# Altium PCB icmu150_n32_dp.PcbDoc
Units mm, origin at the board's own origin, x right, y up, seen from the top; angles counter-clockwise.
Board outline 46 x 33.03 mm, 4 copper layers (Top Layer, L1, L2, Bottom Layer), stack 1.522 mm thick; 23 components, 9 nets, 92 pads, 40 vias.
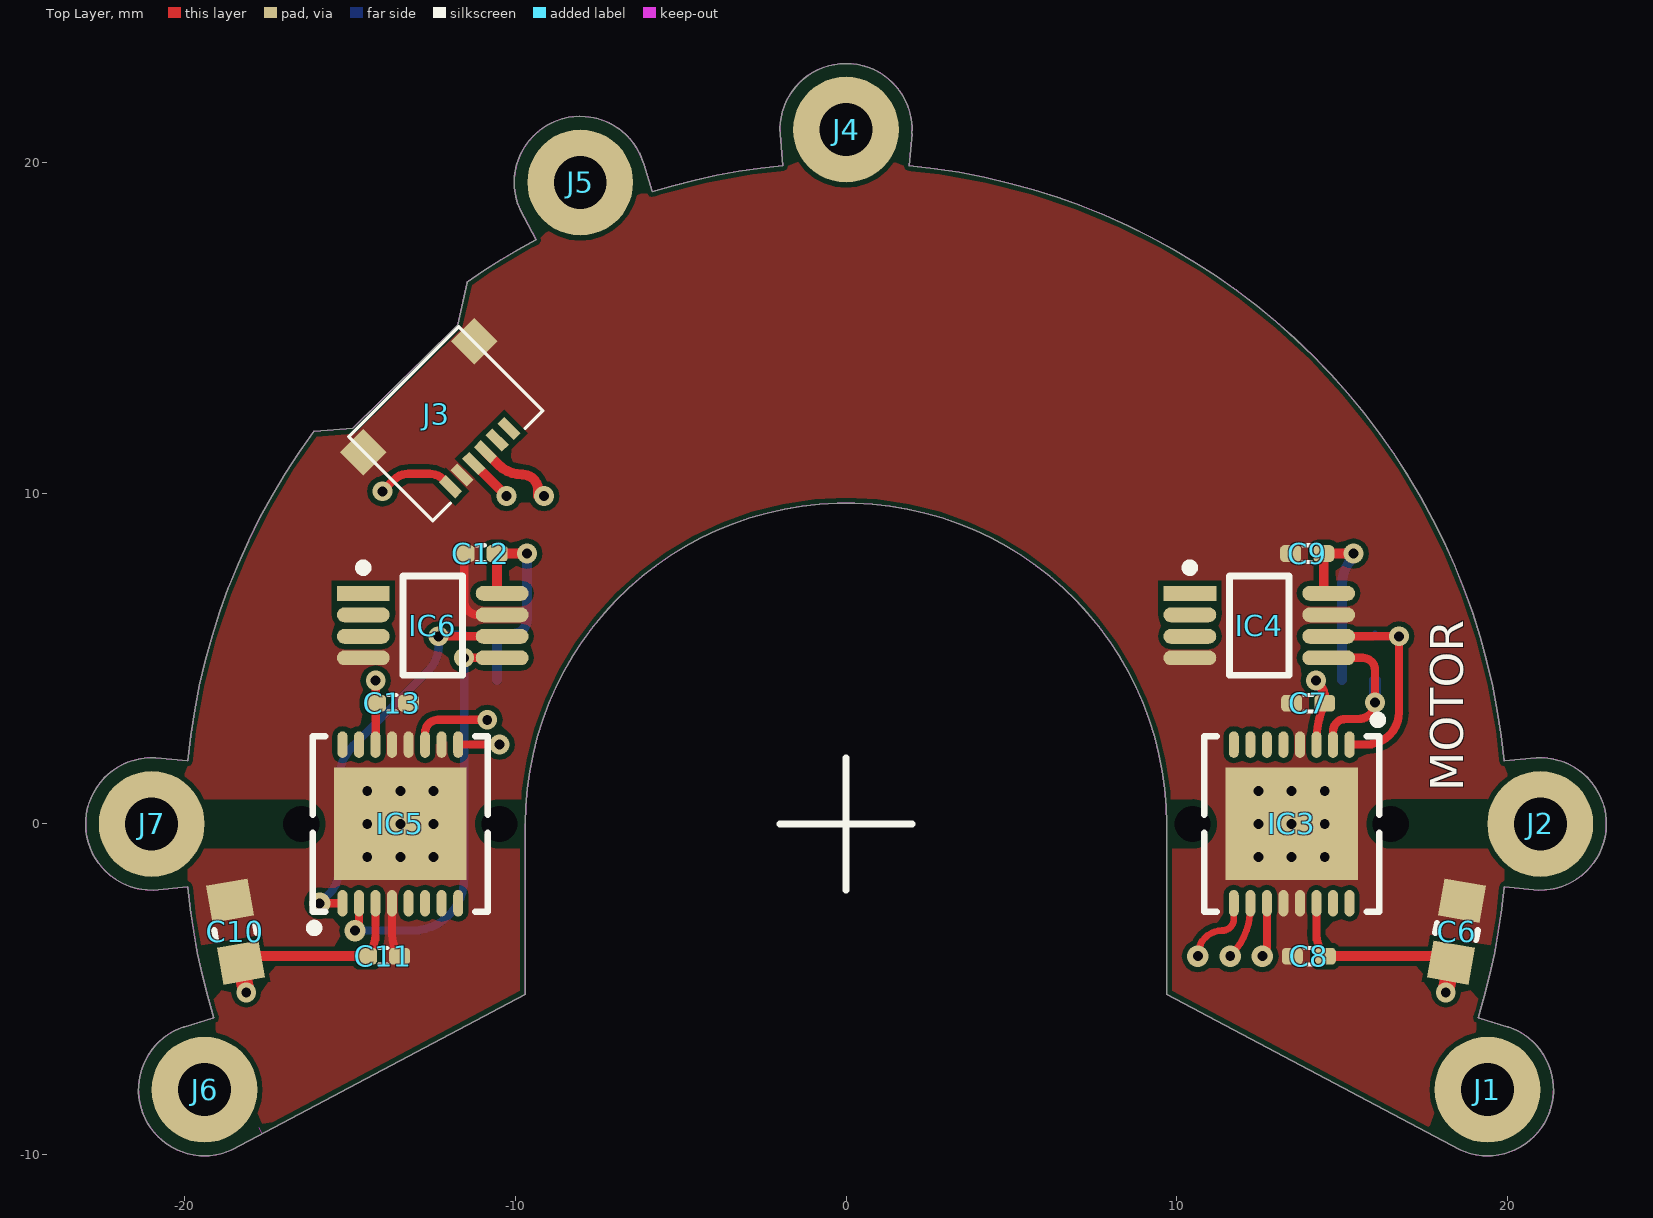
[diagram p0: Top Layer view]
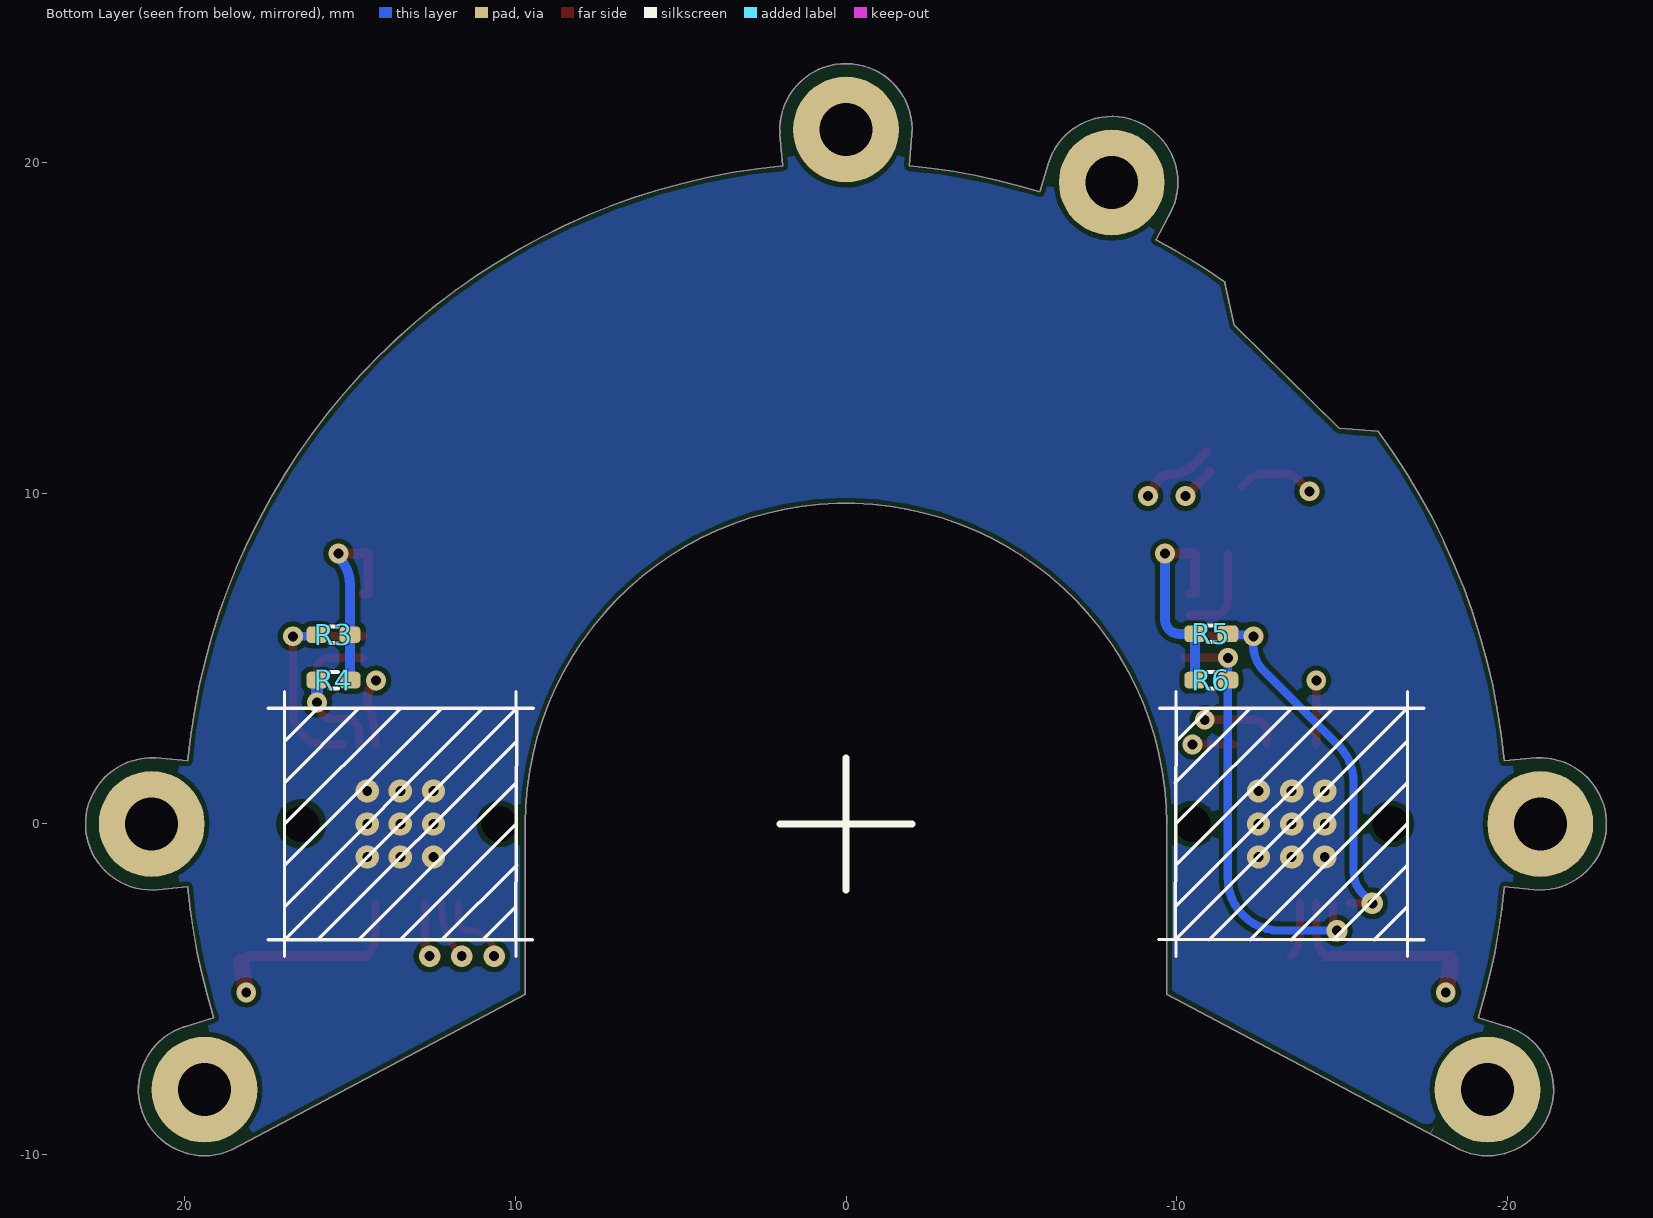
[diagram p1: Bottom Layer view, seen from below]
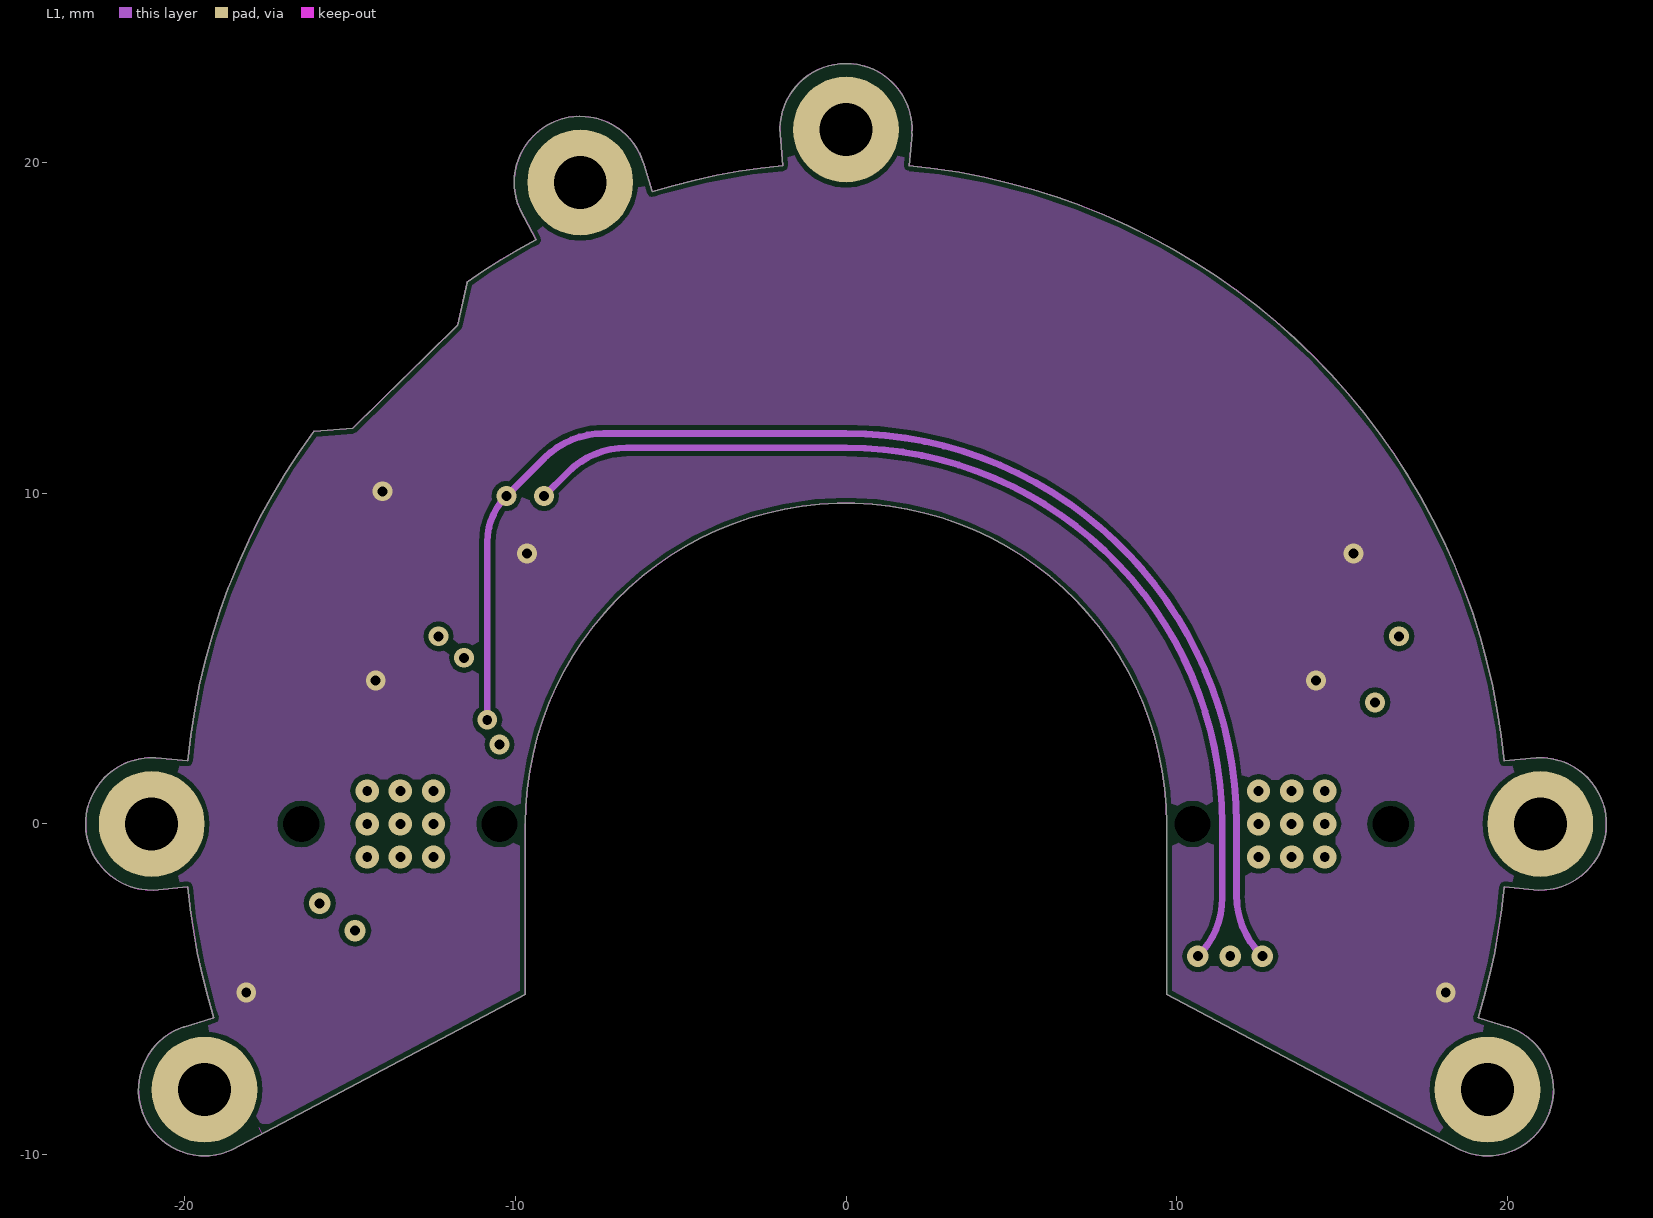
[diagram p2: L1]
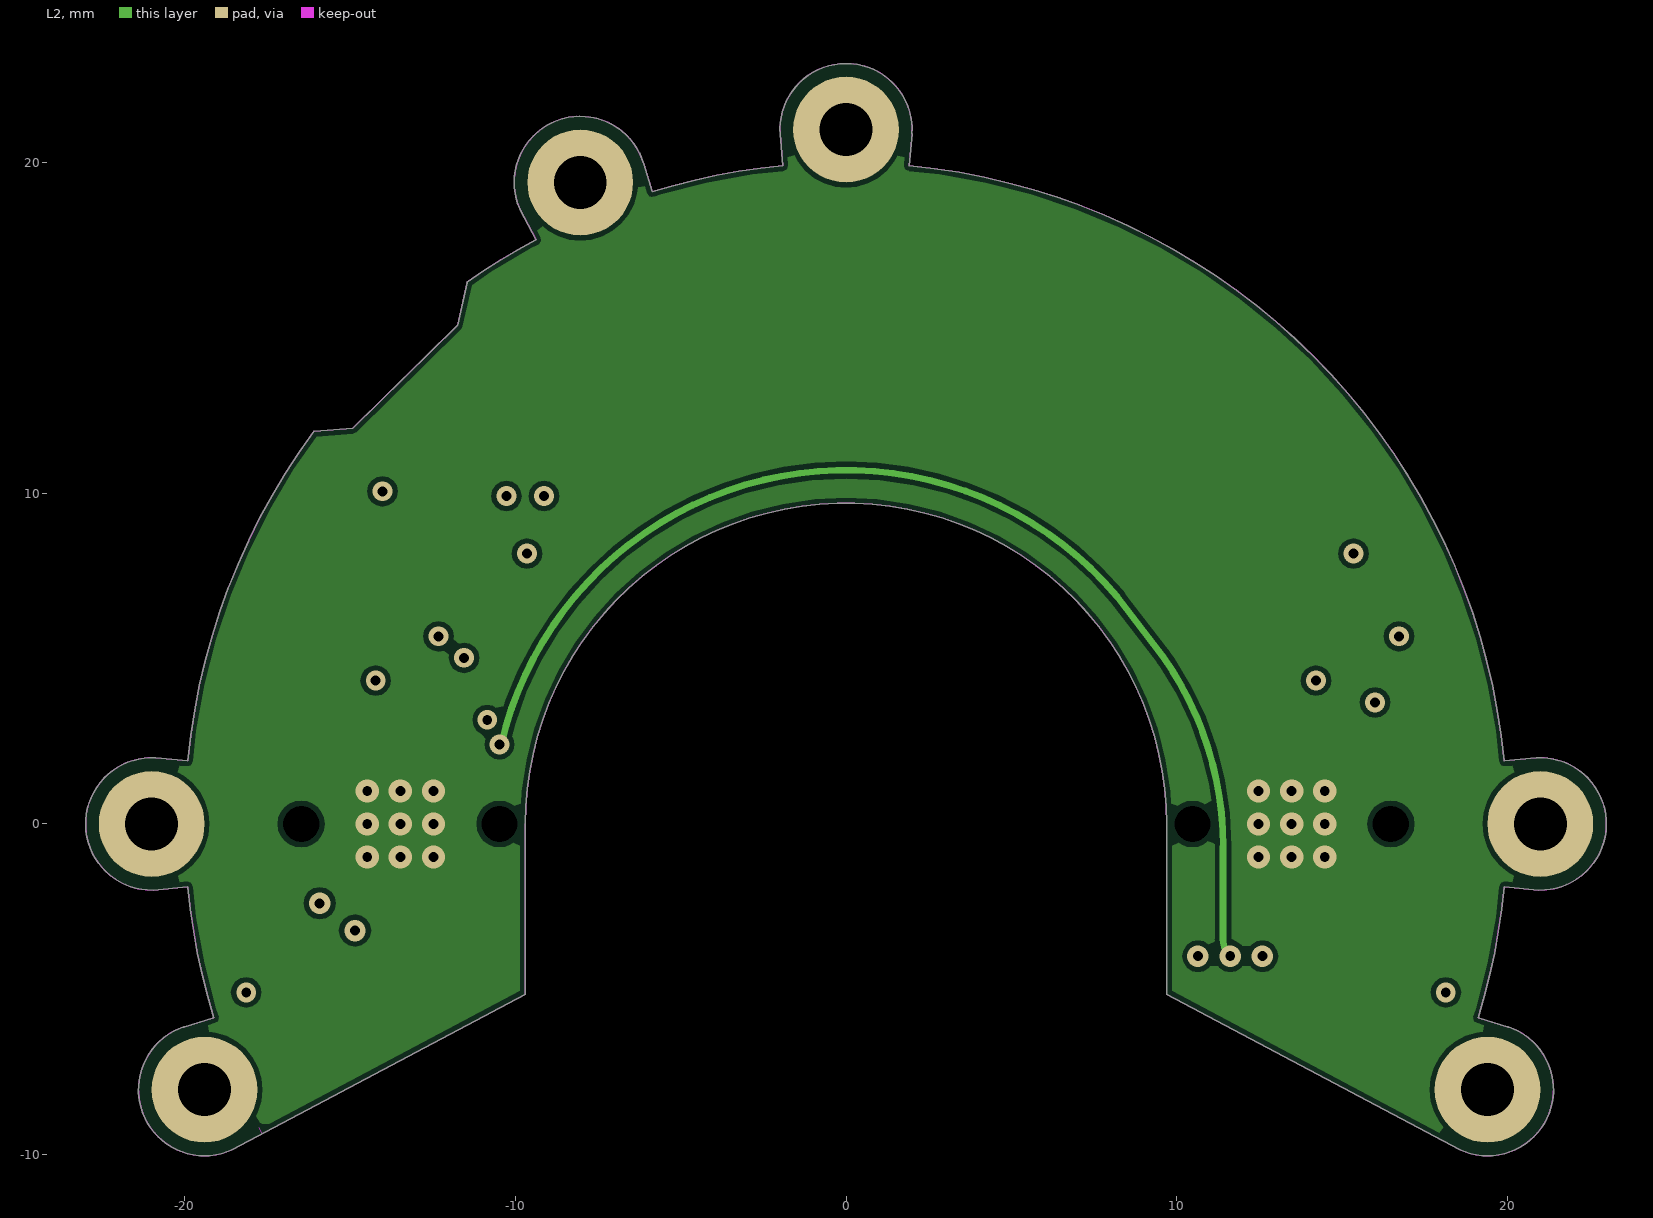
[diagram p3: L2]
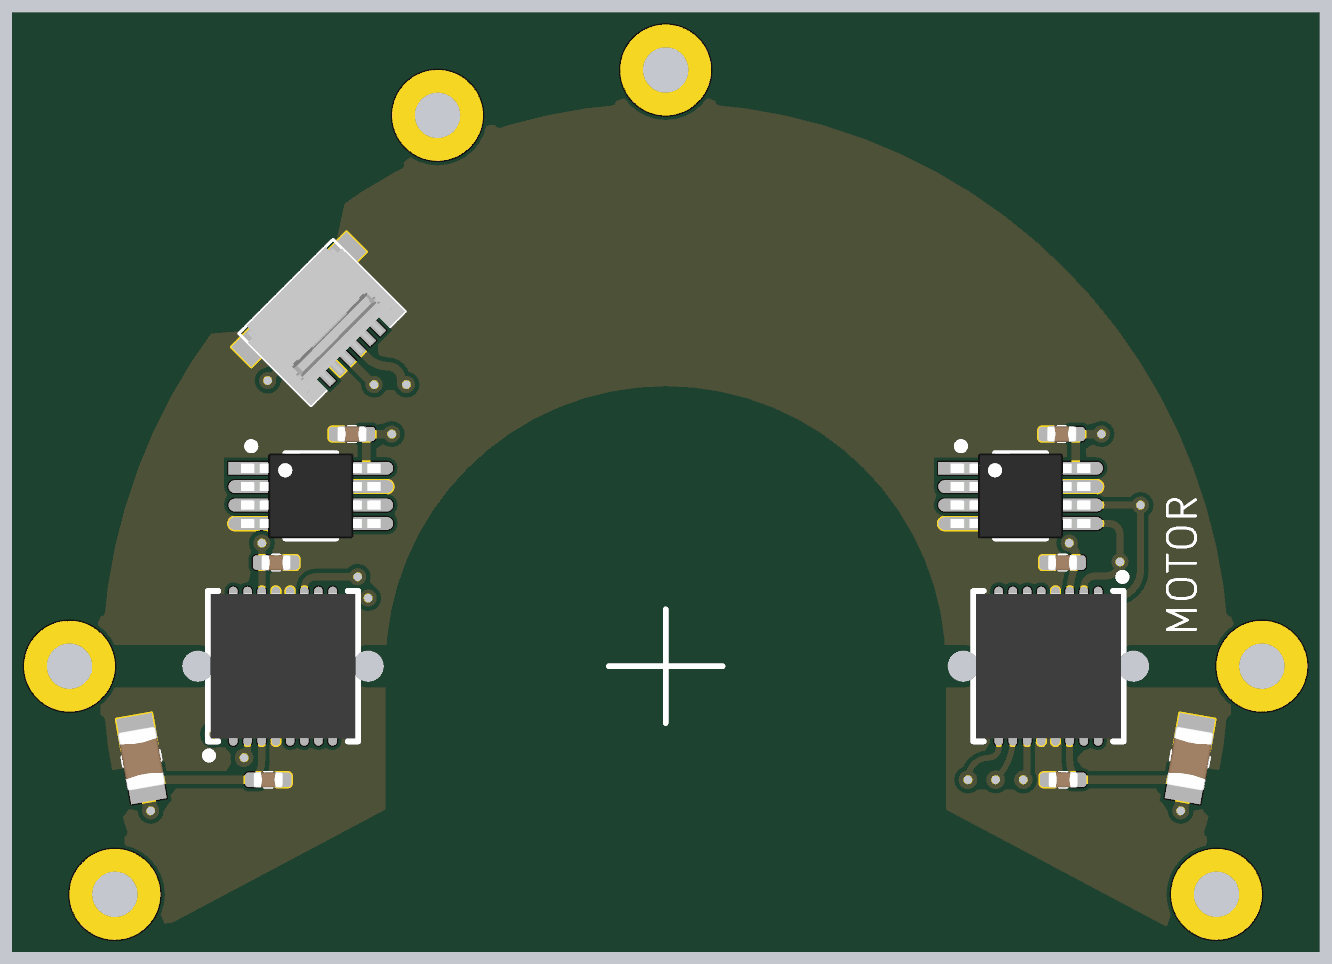
[diagram p4: 3D render of the assembled board from above, using the file's embedded part models]
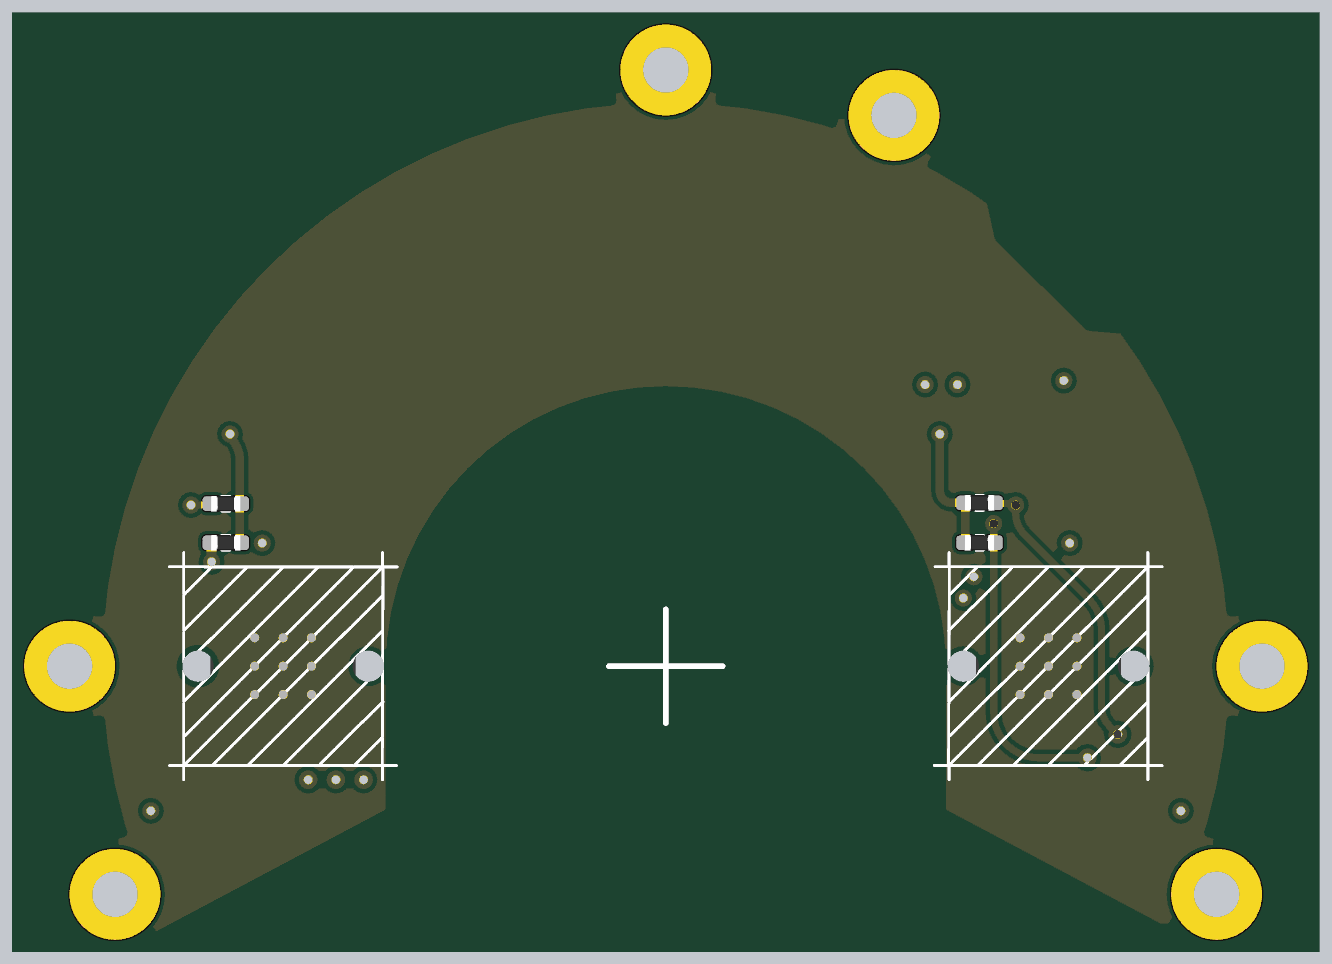
[diagram p5: 3D render of the assembled board from below, using the file's embedded part models]

## Layer stack, top to bottom
Top Solder: solder mask 0.0254, SM-001, Dk 4
Top Layer: signal copper 0.018
Dielectric 1: prepreg 0.125, PP-006, Dk 4.1
L1: signal copper 0.018
Dielectric 2: prepreg 1.2, PP-006, Dk 4.1
L2: signal copper 0.018
Dielectric1: core 0.125, FR-4, Dk 4.2
Bottom Layer: signal copper 0.018
Bottom Solder: solder mask 0.0254, SM-001, Dk 4

## Board outline
-19.121,-5.866 cw(c0,0) -19.909,-1.909 -19.914,-1.9 -20.953,-1.999 -20.955,-1.999 cw(c-21,0) -20.876,1.996 -20.877,1.998 -19.913,1.906 -19.909,1.907 cw(c0,0) -16.091,11.878 -16.085,11.873 -14.914,11.972 -11.747,15.084 -11.462,16.376 -11.469,16.385 cw(c0,0) -9.375,17.666 -9.857,18.574 cw(c-8.036,19.401) -6.118,19.968 -5.866,19.121 cw(c0,0) -1.909,19.909 -1.995,20.86 cw(c0,21) 1.996,20.876 1.998,20.877 1.906,19.913 1.907,19.909 cw(c0,0) 19.909,1.907 19.913,1.906 20.877,1.998 20.876,1.996 cw(c21,0) 20.955,-1.999 20.953,-1.999 19.914,-1.9 19.909,-1.909 cw(c0,0) 19.121,-5.866 19.12,-5.862 20.041,-6.145 20.019,-6.134 cw(c19.401,-8.036) 18.574,-9.857 9.7,-5.146 9.7,0 ccw(c0,0) -9.7,0 -9.7,-5.146 -18.574,-9.857 cw(c-19.401,-8.036) -20.019,-6.134 -20.041,-6.145

## Design rules (kind name [scope] priority, off if disabled: settings)
AcuteAngle [All] p1: minimum=6.00000000000000E+0001 checktracksonly=TRUE
Clearance [All] p1: gap=0.152 ignorepadtopadclearanceinfootprint=FALSE
ComponentClearance [All] p1 off: gap=0.254 collisioncheckmode=3 verticalgap=0.254 showdistances=FALSE
DiffPairsRouting [All] p1 off: maxlimit=0.254 minlimit=0.254 mostfreqgap=0.254 toplayer_minwidth=0.381 toplayer_maxwidth=0.381 toplayer_prefwidth=0.381 midlayer1_minwidth=0.381 midlayer1_maxwidth=0.381 midlayer1_prefwidth=0.381 midlayer2_minwidth=0.381 midlayer2_maxwidth=0.381 midlayer2_prefwidth=0.381 bottomlayer_minwidth=0.381 bottomlayer_maxwidth=0.381 bottomlayer_prefwidth=0.381 maxuncoupledlength=12.7
FabricationTestPointUsage [All] p1 off: valid=0 allowmultiple=FALSE
FabricationTestpoint [All] p1 off: side=3 testpointundercomponent=TRUE minsize=1.016 maxsize=2.54 preferedsize=1.524 minholesize=0 maxholesize=1.016 preferedholesize=0.813 testpointgrid=0.025 allowsidetop=TRUE allowsidebottom=TRUE usegrid=TRUE gridtolerance=0
FanoutControl Fanout_BGA [IsBGA] p1 off: bgadir=Out bgaviamode=Centered fanoutstyle=Auto fanoutdirection=Alternating viagrid=0.025 // Fanout_BGA (Default Rule)
FanoutControl Fanout_LCC [IsLCC] p2 off: bgadir=Out bgaviamode=Centered fanoutstyle=Auto fanoutdirection=Alternating viagrid=0.025 // Fanout_LCC (Default Rule)
FanoutControl Fanout_SOIC [IsSOIC] p3 off: bgadir=Out bgaviamode=Centered fanoutstyle=Auto fanoutdirection=Alternating viagrid=0.025 // Fanout_SOIC (Default Rule)
FanoutControl Fanout_Small [(CompPinCount < 5)] p4 off: bgadir=Out bgaviamode=Centered fanoutstyle=Auto fanoutdirection=OutThenIn viagrid=0.025 // Fanout_Small (Default Rule)
FanoutControl Fanout_Default [All] p5 off: bgadir=Out bgaviamode=Centered fanoutstyle=Auto fanoutdirection=Alternating viagrid=0.025 // Fanout_Default (Default Rule)
Height [All] p1 off: minheight=0 maxheight=25.4 prefheight=12.7
HoleSize [All] p1 off: absolutevalues=TRUE maxlimit=2.54 minlimit=0.025 maxpercent=80.000 minpercent=20.000
HoleToHoleClearance [All] p1 off: gap=0.254 allowstackedmicrovias=TRUE
LayerPairs [All] p1 off: enforce=TRUE
MinimumSolderMaskSliver [All] p1 off: minsoldermaskwidth=0.254
NetAntennae [All] p1 off: netantennaetolerance=0
PasteMaskExpansion [All] p1 off: expansion=0
PlaneClearance [All] p1: clearance=0
PlaneConnect [All] p1: planeconnectstyle=Direct reliefexpansion=0.3 reliefentries=4 reliefconductorwidth=0.381 reliefairgap=0.178
PolygonConnect [All] p1: connectstyle=Direct reliefconductorwidth=0.381 reliefentries=4 polygonreliefangle="90 Angle" airgapwidth=0.356
RoutingVias [All] p1: holewidth=0.3 width=0.6 viastyle="Through Hole" minholewidth=0.2 minwidth=0.45 maxholewidth=0.9 maxwidth=1.27
ShortCircuit [All] p1 off: allowed=FALSE
SilkToBoardRegionClearance [All] p1 off:
SilkToSilkClearance [All] p1 off: silktosilkclearance=0.254
SilkToSolderMaskClearance [IsPad] p1 off: minsilkscreentomaskgap=0.254 clearancetoexposedcopper=TRUE
SolderMaskExpansion [All] p1 off: expansion=0.102
UnRoutedNet [All] p1 off:
UnpouredPolygon [All] p1 off:
Width [All] p1: maxlimit=3.81 minlimit=0.203 preferedwidth=0.254
6 further rules are at their usual default settings.

## Components (designator, comment, footprint, x,y, rotation, side; value= is the part's Value field where it differs from the comment)
C6 "47u 6.3V" RC_0805_T0.8 18.465,-3.256 r80 top value="CAP TANT POLY 47UF 6.3V SMD"
C7 "0.1u" RC_0402_T0.55 13.98,3.65 r180 top value="CAP CER 0.1UF 16V X7R 0402"
C8 "0.1u" RC_0402_T0.55 14,-4 r180 top value="CAP CER 0.1UF 16V X7R 0402"
C9 "0.1u" RC_0402_T0.55 13.95,8.177 r180 top value="CAP CER 0.1UF 16V X7R 0402"
C10 "47u 6.3V" RC_0805_T0.8 -18.465,-3.256 r100 top value="CAP TANT POLY 47UF 6.3V SMD"
C11 "0.1u" RC_0402_T0.55 -14,-4 r0 top value="CAP CER 0.1UF 16V X7R 0402"
C12 "0.1u" RC_0402_T0.55 -11.05,8.177 r180 top value="CAP CER 0.1UF 16V X7R 0402"
C13 "0.1u" RC_0402_T0.55 -13.725,3.65 r0 top value="CAP CER 0.1UF 16V X7R 0402"
IC3 "IC-MU150" RR_DFN16 13.48,0 r270 top locked value="Magnetic Off-Axis Absolute Position Encoder - pole width 1.50 mm"
IC4 "24AA02-I/MS" RR_MSOP8 12.5,6 r0 top value="IC EEPROM 2K I2C 400KHZ 8MSOP"
IC5 "IC-MU150" RR_DFN16 -13.48,0 r90 top locked value="Magnetic Off-Axis Absolute Position Encoder - pole width 1.50 mm"
IC6 "24AA02-I/MS" RR_MSOP8 -12.5,6 r0 top value="IC EEPROM 2K I2C 400KHZ 8MSOP"
J1 "Socket" PIN 19.401,-8.036 r337.5 top
J2 "Socket" PIN 21,0 r0 top
J3 "5034800600 Molex" "RR_CONN_FPC_6_05_MOLEX wo pad" -12.106,12.106 r225 top value="CONN FFC FPC 6POS 0.50MM"
J4 "Socket" PIN 0,21 r90 top
J5 "Socket" PIN -8.036,19.401 r112.5 top
J6 "Socket" PIN -19.401,-8.036 r202.5 top
J7 "Socket" PIN -21,0 r180 top
R3 "1.5k" RR_0402 15.5,5.725 r0 bottom value="RES SMD 1.5K OHM 1% 1/16W 0402"
R4 "1.5k" RR_0402 15.5,4.35 r0 bottom value="RES SMD 1.5K OHM 1% 1/16W 0402"
R5 "1.5k" RR_0402 -11.05,5.75 r180 bottom value="RES SMD 1.5K OHM 1% 1/16W 0402"
R6 "1.5k" RR_0402 -11.05,4.35 r180 bottom value="RES SMD 1.5K OHM 1% 1/16W 0402"

## Footprints (in the part's own frame and the unit in brackets; to place one, negate y for a bottom-side part, rotate by r counter-clockwise, add the part's x,y. Pads: shape width x height; smd on the part's side, far side on the other; paste and mask are expansions set on the pad)
PIN [mm]
  round 3.2 hole 1.6 mask+0.05: 1(0,0)
RC_0402_T0.55 [mm] "Chip Capacitor Body"
  rrect50% 0.635x0.508 smd mask+0.05: 1(-0.5,0) 2(0.5,0)
  silkscreen extent -0.13,-0.25 0.13,0.25, body extent -0.52,-0.27 0.53,0.28, height 0.55
RC_0805_T0.8 [mil] "Chip Capacitor"
  rect 45x50 smd mask+1.97: 1(-37.5,0) 2(37.5,0)
  silkscreen extent -6,-25 6,25, body extent -41,-27 41,27, height 22
RR_0402 [mil]
  rrect50% 25x20 smd mask+1.97: 1(-19.68,0) 2(19.69,0)
  silkscreen extent -5,-10 5,10, body extent -21,-11 21,11, height 16
"RR_CONN_FPC_6_05_MOLEX wo pad" [mm]
  rect 0.3x0.7 smd mask+0.05: 1(-1.25,1.45) 2(-0.75,1.45) 3(-0.25,1.45) 4(0.25,1.45) 5(0.75,1.45) 6(1.25,1.45)
  rect 1x1 smd mask+0.05: 7(-2.37,-1.15) 7(2.37,-1.15)
  silkscreen extent -2.35,-1.8 2.35,1.8, body extent -2.35,-1.8 2.35,1.8, height 1.88
RR_DFN16 [mm] "DFN, 16-Leads, Body 5,00x5,00mm, Pitch 0,50mm, Thermal Pad 4,00x3,45mm, IPC Medium Density"
  oval 0.8x0.3 smd mask+0.05: 1(-2.4,1.75) 2(-2.4,1.25) 3(-2.4,0.75) 4(-2.4,0.25) 5(-2.4,-0.25) 6(-2.4,-0.75) 7(-2.4,-1.25) 8(-2.4,-1.75) 9(2.4,-1.75) 10(2.4,-1.25) 11(2.4,-0.75) 12(2.4,-0.25) 13(2.4,0.25) 14(2.4,0.75) 15(2.4,1.25) 16(2.4,1.75)
  rect 3.4x4 smd mask+0.05: 17(0,0)
  silkscreen extent -3.27,-2.65 2.65,2.73, body extent -2.56,-2.55 2.56,2.55, height 1
RR_MSOP8 [mm] "MSOP, 8-Leads"
  rect 1.6x0.45 smd mask+0.05: 1(-2.1,0.975)
  oval 1.6x0.45 smd mask+0.05: 2(-2.1,0.325) 3(-2.1,-0.325) 4(-2.1,-0.975) 5(2.1,-0.975) 6(2.1,-0.325) 7(2.1,0.325) 8(2.1,0.975)
  silkscreen extent -2.23,-1.5 0.9,1.87, body extent -2.46,-1.5 2.46,1.5, height 1.1

## Part data
C6 C10: library part "Cap Pol2", "Polarized Capacitor (Axial)", Manufacturer=Yageo, Package=0805, Cost=0,1, Order Number=T58W9476M6R3C0150
C7 C8 C9 C11 C12 C13: library part Cap, "Capacitor", Manufacturer=Yageo, Package=0402, Cost=0,1, Order Number=CC0402KRX7R7BB104
IC3 IC5: "Magnetic Encoder", Manufacturer=iC-Haus, Package=DFN16-5x5, Cost=15,0, Order Number="iC-MU150 DFN16-5x5"
IC4 IC6: library part 24AA02-I/SM, Manufacturer="Microchip Technology", Package=MSOP8, Cost=0,27, Order Number=24AA02-I/MS
J3: library part "Header 7", "Header, 7-Pin", Manufacturer=Molex, Package=Nonstandart, Cost=0,74, Order Number=5034800600
R3 R4 R5 R6: library part Res1, "Resistor", Manufacturer=Yageo, Package=0402, Cost=0,1, Order Number=RC0402FR-071K5L

## Free pads (board coordinates)
  round 0 hole 1.1 unplated: E(-16.48,0) E(-10.48,0) E(10.48,0) E(16.48,0)

## Via types
v1: diameter 0.7, hole 0.3, Top Layer to Bottom Layer, tented both sides, 18 vias
v2: diameter 0.6, hole 0.3, Top Layer to Bottom Layer, tented both sides, 17 vias
v3: diameter 0.65, hole 0.3, Top Layer to Bottom Layer, tented both sides, 5 vias

## Nets (pads, with @x,y where several pads share a name; then routed paths per layer and width w, separated by ;. In a path a pad name is that pad's centre, name@x,y a point inside that pad or via, vN(x,y) a via of type N, cw(c..) or ccw(c..) an arc to the next point about the centre after c; other vN are vias at no path point)
G0_SCL: IC3.1 IC4.6 R3.2 | length 7.2
  Top Layer w0.25: IC4.6 v2(16.725,5.675) 16.725,3.382 cw(c15.743,3.382) 15.743,2.4 IC3.1
  Bottom Layer w0.25: R3.2 ccw(c16.05,5.725) 16.05,5.675 v2(16.725,5.675)
  other v2: 16.725,5.675
G0_SDA: IC3.2 IC4.5 R4.2 | length 5.4
  Top Layer w0.25: IC4.5 15.625,5.025 cw(c15.625,4.65) 16,4.65 v2(16,3.675) cw(c15.5,3.675) 15.5,3.175 15.106,3.175 ccw(c15.106,2.799) 14.73,2.799 IC3.2
  Bottom Layer w0.35: v2(16,3.675) R4.2
  other v2: 16,3.675
G0_SLI: IC3.10 IC5.9 | length 38.5
  Top Layer w0.203: v3(11.621,-4) ccw(c10.151,-2.53) 12.23,-2.53 IC3.10
  Top Layer w0.25: IC5.9 v2(-10.48,2.4)
  L2 w0.203: v2@-10.43,2.389 cw(c0,0) 8.197,6.878 9.599,5.048 cw(c1.407,-0.687) 11.407,-0.687 ; 11.405,-0.687 11.405,-3.478 ccw(c12.143,-3.478) v3(11.621,-4)
G1_SCL: IC5.1 IC6.6 R5.2 | length 12.8
  Top Layer w0.25: v3(-15.92,-2.4) IC5.1 ; v2(-12.325,5.675) IC6.6
  Bottom Layer w0.25: v3(-15.92,-2.4) -15.618,-2.098 ; -15.617,-2.097 ccw(c-16.257,-1.459) -15.353,-1.459 -15.353,1.257 cw(c-13.753,1.257) -14.884,2.388 -12.626,4.646 ; -12.626,4.646 ccw(c-13.366,5.385) -12.32,5.385 -12.32,5.675 cw(c-12.199,5.554) -12.273,5.708 cw(c-12.199,5.554) -12.199,5.725 R5.2@-11.55,5.725
G1_SDA: IC5.2 IC6.5 R6.2 | length 13
  Top Layer w0.25: v3@-14.825,-3.225 ccw(c-15.054,-2.996) -14.73,-2.996 IC5.2 ; v2(-11.55,5.025) IC6.5 -10.316,5.025 IC6.5@-10.233,5.025
  Bottom Layer w0.25: v3(-14.85,-3.225) -13.12,-3.225 ccw(c-13.12,-1.655) -11.55,-1.655 v2(-11.55,5.025)
GND: C6.2 C7.2 C8.2 C9.2 C10.2 C11.2 C12.2 C13.2 IC3.4 IC3.12 IC3.13 IC3.17 IC4.4 IC4.7 IC5.4 IC5.10 IC5.12 IC5.13 IC5.17 IC6.4 IC6.7 J3.5 J3.7 | length 4.5
  Top Layer w0.25: IC5.4 -13.73,-3.348 ccw(c-12.808,-3.348) C11.2@-13.46,-4 ; C12.2 -11.55,6.752 ccw(c-11.123,6.752) -11.123,6.325 IC6.7
  other v1: -14.48,-1 -13.48,-1 -12.48,-1 12.48,-1 13.48,-1 14.48,-1 -14.48,0 -13.48,0 -12.48,0 12.48,0 13.48,0 14.48,0 -14.48,1 -13.48,1 -12.48,1 12.48,1 13.48,1 14.48,1
MA: IC3.11 IC5.11 J3.4 | length 45.8
  Top Layer w0.25: IC5.11 -12.73,2.759 cw(c-12.339,2.759) -12.339,3.15 v2(-10.85,3.15) ; v3(12.596,-4) ccw(c12.272,-3.676) 12.73,-3.676 IC3.11
  Top Layer w0.3: -10.996,10.643 v2(-10.272,9.919)
  L1 w0.203: v2(-10.85,3.15) -10.85,8.524 cw(c-8.877,8.524) v2(-10.272,9.919) -9.124,11.067 cw(c-7.328,9.271) -7.328,11.811 0,11.811 cw(c0,0) 11.811,0 11.811,-2.163 ccw(c14.351,-2.163) 12.555,-3.959 v3(12.596,-4)
SLO: IC3.9 J3.3 | length 36.2
  Top Layer w0.203: v3(10.646,-4) 10.646,-3.958 cw(c11.379,-3.958) 11.379,-3.225 ccw(c11.379,-2.874) 11.73,-2.874 IC3.9
  Top Layer w0.3: J3.3 -10.518,10.871 ccw(c-9.782,11.607) -9.782,10.566 cw(c-9.782,10.096) -9.311,10.096 v2@-9.311,9.919
  L1 w0.203: v2(-9.133,9.919) -8.417,10.635 cw(c-6.621,8.839) -6.621,11.379 0,11.379 cw(c0,0) 11.379,0 11.379,-2.23 cw(c8.876,-2.23) v3(10.646,-4)
Venc: C6.1 C7.1 C8.1 C9.1 C10.1 C11.1 C12.1 C13.1 IC3.3 IC3.14 IC4.8 IC5.3 IC5.14 IC6.8 J3.6 R3.1 R4.1 R5.1 R6.1 | length 32.1
  Top Layer w0.25: C11.1 ccw(c-15.152,-3.348) -14.23,-3.348 IC5.3 ; IC5.14@-14.225,2.4 C13.1 v2(-14.225,4.335) ; IC3.3@14.225,2.4 IC3.3 cw(c16.976,2.501) C7.1 ; IC3.14 14.23,-3.348 ccw(c15.152,-3.348) C8.1
  Top Layer w0.254: v2(-14.019,10.061) -13.666,10.414 cw(c-13.237,9.985) -13.237,10.592 -12.598,10.592 cw(c-12.598,10.015) -12.191,10.423 J3.6
  Top Layer w0.3: C10.1@-18.3,-4 C11.1 ; IC6.8 -10.55,6.975 C12.1 v2(-9.65,8.177) ; v2(14.215,4.335) cw(c13.638,3.718) C7.1@14.48,3.65 ; C8.1 14.788,-4 18.106,-4 C6.1 ; IC4.8 14.45,6.975 C9.1 v2(15.35,8.177)
  Top Layer w0.508: C10.1 v2(-18.141,-5.094) ; v2(18.141,-5.094) C6.1
  Bottom Layer w0.3: R6.1 R5.1@-10.55,5.725 ; R5.1 -10.077,5.751 ccw(c-10.077,6.177) -9.65,6.177 v2@-9.65,8.075 ; v2@14.215,4.294 cw(c14.279,4.285) 14.23,4.327 cw(c14.279,4.285) v2@14.279,4.35 ; R4.1 R3.1 15,7.23 cw(c16.195,7.23) v2@15.35,8.075
  Bottom Layer w0.5: v2@14.215,4.294 cw(c15.95,4.335) v2(14.215,4.335)
pads on no net: IC3.5 IC3.6 IC3.7 IC3.8 IC3.15 IC3.16 IC4.1 IC4.2 IC4.3 IC5.5 IC5.6 IC5.7 IC5.8 IC5.15 IC5.16 IC6.1 IC6.2 IC6.3 J1.1 J2.1 J3.1 J3.2 J4.1 J5.1 J6.1 J7.1

## Polygon pours and split planes (outlines as drawn)
GND on Bottom Layer "GND_L04_P213" (solid, remove dead copper, pour order 213): -24.028,25 -24.028,-12.5 25,-12.5 25,25
GND on Top Layer "GND_L01_P215" (solid, remove dead copper, pour order 215): -23.825,25 25,25 25,-12.5 -23.825,-12.5
Venc on L1 "VENC_L02_P217" (solid, remove dead copper, pour order 217): -24.257,25 25,25 25,-12.5 -24.257,-12.5
GND on L2 "GND_L03_P219" (solid, remove dead copper, pour order 219): -23.749,25 25,25 25,-12.5 -23.749,-12.5

## Keep-outs
Keep-Out Layer:
  lines w0: -20.955,-1.999 cw(c-21,0) -20.876,1.996 ; -20.953,-1.999 -19.914,-1.9 ; -20.877,1.998 -19.913,1.906 ; -20.041,-6.145 -19.12,-5.862 ; -20.019,-6.134 ccw(c-19.401,-8.036) -18.574,-9.857 -9.7,-5.146 -9.7,0 cw(c0,0) 9.7,0 9.7,-5.146 18.574,-9.857 ccw(c19.401,-8.036) 20.019,-6.134 ; -19.909,-1.909 ccw(c0,0) -19.121,-5.866 ; -19.909,1.907 cw(c0,0) -16.091,11.878 ; -17.765,-9.187 ccw(c0,0) -17.667,-9.374 ; -16.085,11.873 -14.914,11.972 -11.747,15.084 -11.462,16.376 ; -11.469,16.385 cw(c0,0) -9.375,17.666 -9.857,18.574 cw(c-8.036,19.401) -6.118,19.968 -5.866,19.121 cw(c0,0) -1.909,19.909 -1.995,20.86 cw(c0,21) 1.996,20.876 ; 1.906,19.913 1.998,20.877 ; 1.907,19.909 cw(c0,0) 19.909,1.907 ; 19.121,-5.866 ccw(c0,0) 19.909,-1.909 ; 19.12,-5.862 20.041,-6.145 ; 19.913,1.906 20.877,1.998 ; 19.914,-1.9 20.953,-1.999 ; 20.876,1.996 cw(c21,0) 20.955,-1.999

## Other copper
Top Layer:
  pour cut-out: 16.48,-0.75 cw(c16.48,0) 15.73,0 cw(c16.48,0) 16.48,0.75 20.955,0.75 20.955,-0.75
  pour cut-out: -16.48,0.75 cw(c-16.48,0) -15.73,0 cw(c-16.48,0) -16.48,-0.75 -20.599,-0.75 -20.599,0.75
  pour cut-out: -10.48,0.75 ccw(c-10.48,0) -11.23,0 ccw(c-10.48,0) -10.48,-0.75 -9.08,-0.75 -9.08,0.75
  pour cut-out: 10.48,-0.75 ccw(c10.48,0) 11.23,0 ccw(c10.48,0) 10.48,0.75 9.08,0.75 9.08,-0.75
  pour cut-out: -17.773,-3.366 -20.474,-3.843 -20.223,-5.268 -17.521,-4.792
  pour cut-out: 17.544,-4.664 20.246,-5.14 20.474,-3.842 17.773,-3.366
  region: 12.754,11.129
Bottom Layer:
  pour cut-out: 16.48,0.75 cw(c16.48,0) 17.23,0 cw(c16.48,0) 16.48,-0.75
  pour cut-out: 16.48,-0.75 cw(c16.48,0) 15.73,0 cw(c16.48,0) 16.48,0.75

## Silkscreen, mask and mechanical layers (free items; w line width, h text height)
Top Overlay:
  lines w0.2: -2,0 2,0 ; 0,-2 0,2
  text "MOTOR" at 18.669,0.991 h1 r90
Bottom Overlay:
  lines w0.2: -2,0 2,0 ; 0,-2 0,2